# EAGLE board TCAN4551-BoB-R2B (EAGLE 7.5.0)
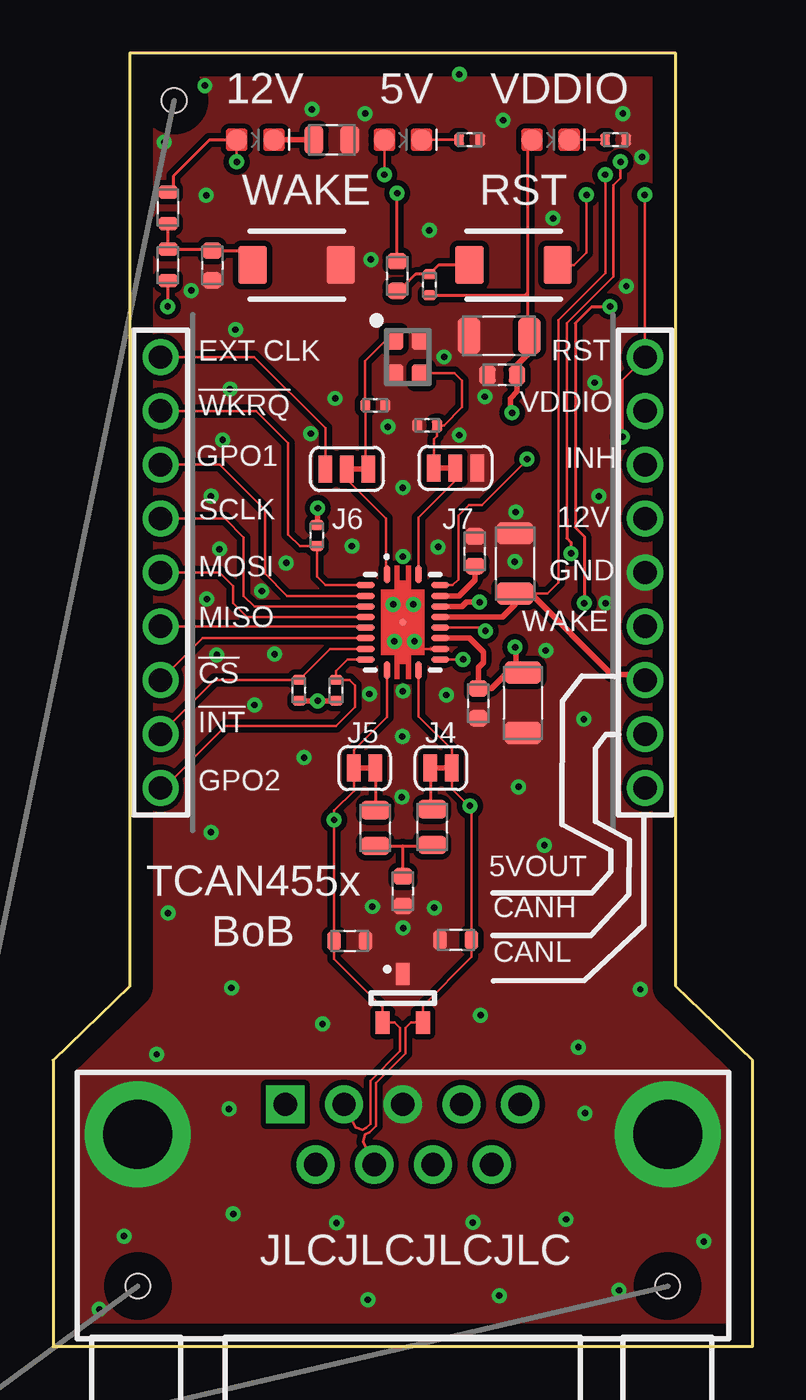
[diagram p0: board, top side]
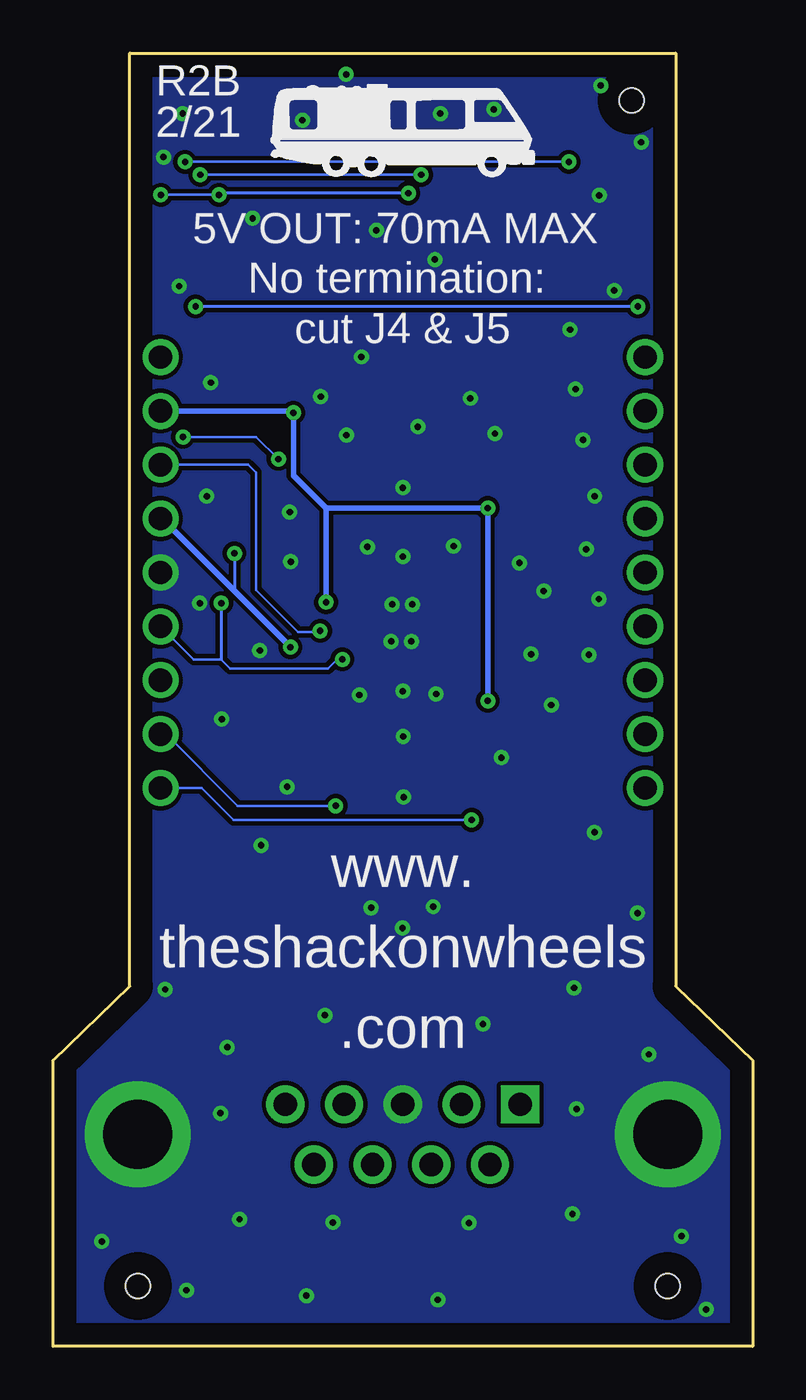
[diagram p1: board, bottom side, seen from below]

Size 33 x 61 mm. Coordinates in mm from the lower left corner, seen from the top.
Outline: 29.38,61 3.62,61 3.62,16.99 0,13.5 0,0 33,0 33,13.5 29.38,16.99 29.38,61
Copper layers (1*16): Top 0.035mm / dielectric 1.5mm / Bottom 0.035mm
Design rules "default *": minimum track width 10mil, minimum drill 0.61mm, track to track 8mil, track to pad 8mil, pad to pad 8mil, via to via 8mil, smd to smd 8mil, copper to edge 40mil, drill to drill 8mil, minimum pad ring 0mil, minimum via ring 8mil, stop-mask expansion 2mil, vias tented up to drill 12mil, thermal gap 10mil
Net classes: 0 Default: width 0.127 mm, clearance 0.127 mm, clearance 0.127 mm to class 1, clearance 0.127 mm to class 2; 1 DiffPair: width 0.127 mm, clearance 0.127 mm, clearance 0.127 mm to class 0, clearance 0.127 mm to class 2; 2 Power: width 0.25 mm, clearance 0.127 mm, clearance 0.127 mm to class 0, clearance 0.127 mm to class 1
Holes 1.15 mm at 5.71,58.76 29,2.84 4,2.84

## Footprints (pad centres in the part's own frame; a part is rotated, then mirrored left to right if it is on the bottom)
CAP_0603_L = smd 0.77 x 0.87: 1 -0.7,0; 2 0.7,0
CAP_0603_L_C2 = smd 0.77 x 0.87: 1 -0.7,0; 2 0.7,0
CAP_1206_L = smd 1.06 x 1.72: 1 -1.425,0; 2 1.425,0
CAP_1206_L_C5 = smd 1.06 x 1.72: 1 -1.425,0; 2 1.425,0
CAP_0603_L_C6 = smd 0.77 x 0.87: 1 -0.7,0; 2 0.7,0
CAP_0603_L_C7 = smd 0.77 x 0.87: 1 -0.7,0; 2 0.7,0
RES_0603_L = smd 0.65 x 0.87: 1 -0.745,0; 2 0.745,0
RES_0603_L_C10 = smd 0.65 x 0.87: 1 -0.745,0; 2 0.745,0
CAP_0402_L = smd 0.49 x 0.59: 1 -0.47,0; 2 0.47,0
CAP_0402_L_C13 = smd 0.49 x 0.59: 1 -0.47,0; 2 0.47,0
LED-0603 = smd 1 x 1: A -0.877,0; C 0.877,0
LED-0603_D2 = smd 1 x 1: A -0.877,0; C 0.877,0
SOT23V2 = smd 1.05 x 0.65: 1 1.15,0; 2 -1.15,-0.95; 3 -1.15,0.95
DS1037-09MNAKT74-0CC = drill 1.1 pad 1.8 square: 1 -5.54,1.42 | drill 1.1 pad 1.8: 2 -2.77,1.42; 3 0,1.42; 4 2.77,1.42; 5 5.54,1.42; 6 -4.115,-1.42; 7 -1.345,-1.42; 8 1.425,-1.42; 9 4.195,-1.42 | drill 3.25 pad 5: 10 -12.5,0; 11 12.5,0
HDR-1x9T/2.54/23x2 = drill 1.1 pad 1.7: 1 -10.16,0; 2 -7.62,0; 3 -5.08,0; 4 -2.54,0; 5 0,0; 6 2.54,0; 7 5.08,0; 8 7.62,0; 9 10.16,0
HDR-1x9T/2.54/23x2_J3 = drill 1.1 pad 1.7: 1 -10.16,0; 2 -7.62,0; 3 -5.08,0; 4 -2.54,0; 5 0,0; 6 2.54,0; 7 5.08,0; 8 7.62,0; 9 10.16,0
SMT-JUMPER_2_NC_TRACE_SILK = smd 0.635 x 1.27: 1 -0.508,0; 2 0.508,0
SMT-JUMPER_2_NC_TRACE_SILK_J5 = smd 0.635 x 1.27: 1 -0.508,0; 2 0.508,0
SMT-JUMPER_3_1-NC_TRACE_SILK = smd 0.635 x 1.27: 1 -1.016,0; 2 0,0; 3 1.016,0
SMT-JUMPER_3_1-NC_TRACE_SILK_J7 = smd 0.635 x 1.27: 1 -1.016,0; 2 0,0; 3 1.016,0
RES_0603_L_R1 = smd 0.65 x 0.87: 1 -0.745,0; 2 0.745,0
RES_0805_L = smd 0.88 x 1.32: 1 -0.845,0; 2 0.845,0
RES_0402_L = smd 0.47 x 0.6: 1 -0.495,0; 2 0.495,0
RES_0402_L_R6 = smd 0.47 x 0.6: 1 -0.495,0; 2 0.495,0
RES_0402_L_R7 = smd 0.47 x 0.6: 1 -0.495,0; 2 0.495,0
RES_0402_L_R8 = smd 0.47 x 0.6: 1 -0.495,0; 2 0.495,0
RES_0805_L_R10 = smd 0.88 x 1.32: 1 -0.845,0; 2 0.845,0
TS-1088-AR02016 = smd 1.35 x 1.8: 1 -2.075,0; 2 2.075,0
RQFN-20/3.5x4.5x0.5 = smd 0.3 x 0.85: 1 -0.75,2.26; 10 -0.75,-2.26; 11 0.75,-2.26; 20 0.75,2.26 | smd 0.85 x 0.3: 2 -1.76,1.75; 3 -1.76,1.25; 4 -1.76,0.75; 5 -1.76,0.25; 6 -1.76,-0.25; 7 -1.76,-0.75; 8 -1.76,-1.25; 9 -1.76,-1.75; 12 1.76,-1.75; 13 1.76,-1.25; 14 1.76,-0.75; 15 1.76,-0.25; 16 1.76,0.25; 17 1.76,0.75; 18 1.76,1.25; 19 1.76,1.75 | smd 0.32 x 0.32: 21 0,0
TXM40M0004252HBCEO00T = smd 1 x 0.9: 1 -0.85,-0.65; 2 0.85,-0.65; 3 0.85,0.65; 4 -0.85,0.65

## Placement (x,y rotation side)
C1  10nF 50V  [CAP_0603_L]  7.52,50.98 270 top
C2  100nF 50V  [CAP_0603_L_C2]  21.19,45.81 180 top
C3  10uF 50V  [CAP_1206_L]  21.04,47.66 180 top
C4  10uF 50V  [CAP_1206_L]  22.17,30.35 270 top
C5  10uF 50V  [CAP_1206_L_C5]  21.8,36.93 90 top
C6  330nF 25V  [CAP_0603_L_C6]  19.9,37.5 90 top
C7  100nF 50V  [CAP_0603_L_C7]  20.06,30.33 270 top
C8  10nF 50V  [CAP_0603_L_C7]  16.23,50.48 270 top
C9  47pF 50V  [RES_0603_L]  19,19.17 180 top
C10  47pF 50V  [RES_0603_L_C10]  14,19.12 0 top
C11  4700pF 50V  [CAP_0603_L]  16.5,21.47 270 top
C12  15pF 50V  [CAP_0402_L]  17.65,43.43 180 top
C13  15pF 50V  [CAP_0402_L_C13]  15.2,44.38 0 top
D1  RED  [LED-0603]  9.54,56.91 0 top
D2  GREEN  [LED-0603_D2]  16.51,56.91 0 top
D3  BLUE  [LED-0603_D2]  23.47,56.91 0 top
D4  SZNUP2105LT1G  [SOT23V2]  16.5,16.42 90 top
J1  DB9 CONNECTOR  [DS1037-09MNAKT74-0CC]  16.5,10 0 top
J2  644456-9  [HDR-1x9T/2.54/23x2]  5.07,36.5 270 top
J3  644456-9  [HDR-1x9T/2.54/23x2_J3]  27.93,36.5 90 top
J4  JUMPER-SMT_2_NC_TRACE_SILK  [SMT-JUMPER_2_NC_TRACE_SILK]  18.3,27.27 0 top
J5  JUMPER-SMT_2_NC_TRACE_SILK  [SMT-JUMPER_2_NC_TRACE_SILK_J5]  14.7,27.27 180 top
J6  JUMPER-SMT_3_1-NC_TRACE_SILK  [SMT-JUMPER_3_1-NC_TRACE_SILK]  13.87,41.38 0 top
J7  JUMPER-SMT_3_1-NC_TRACE_SILK  [SMT-JUMPER_3_1-NC_TRACE_SILK_J7]  18.98,41.43 180 top
R1  3k 1%  [RES_0603_L_R1]  5.43,53.7 270 top
R2  33k 1%  [RES_0603_L_R1]  5.43,51 270 top
R3  10k 1%  [RES_0805_L]  13.16,56.91 180 top
R4  330R 1%  [RES_0402_L]  19.65,56.91 180 top
R5  330R 1%  [RES_0402_L]  26.54,56.91 180 top
R6  10k 1%  [RES_0402_L_R6]  12.45,38.25 270 top
R7  10k 1%  [RES_0402_L_R7]  13.35,30.95 90 top
R8  10k 1%  [RES_0402_L_R8]  11.6,30.95 90 top
R9  10k 1%  [RES_0402_L_R7]  17.76,50.07 90 top
R10  60R4 1/8W  [RES_0805_L_R10]  17.89,24.49 90 top
R11  60R4 1/8W  [RES_0805_L]  15.2,24.45 90 top
S1  TS-1088-AR02016  [TS-1088-AR02016]  11.5,51 0 top
S2  TS-1088-AR02016  [TS-1088-AR02016]  21.73,51 0 top
U1  TCAN4551-Q1  [RQFN-20/3.5x4.5x0.5]  16.5,34.15 0 top
Y1  40MHz  [TXM40M0004252HBCEO00T]  16.73,46.66 270 top

## Library data of the parts
C1 C8 = common; LCSC_BASIC_PART: Yes; LCSC_PART_#: C57112; OPERATING_TEMP: -55C - 125C; PACKAGE_CODE: 0603; TEMP_COEFFICIENT: X7R; TOLERANCE: ±10%; VOLTAGE_RATING: 50V
C2 C7 = common; LCSC_PART_#: C14663; OPERATING_TEMP: -55C - 125C; PACKAGE_CODE: 0603; TEMP_COEFFICIENT: X7R; TOLERANCE: ±10%; VOLTAGE_RATING: 50V
C3-C5 = common; LCSC_PART_#: C13585; OPERATING_TEMP: -40C - 85C; PACKAGE_CODE: 1206; TEMP_COEFFICIENT: X5R; TOLERANCE: ±10%; VOLTAGE_RATING: 50V
C6 = common; LCSC_PART_#: C1615; OPERATING_TEMP: -55C - 125C; PACKAGE_CODE: 0603; TEMP_COEFFICIENT: X7R; TOLERANCE: ±10%; VOLTAGE_RATING: 50V
C9 C10 = common; LCSC_BASIC_PART: Yes; LCSC_PART_#: C1671; OPERATING_TEMP: -55C - 125C; PACKAGE_CODE: 0603; TEMP_COEFFICIENT: C0G; TOLERANCE: ±5%; VOLTAGE_RATING: 50V
C11 = common; LCSC_BASIC_PART: Yes; LCSC_PART_#: C53987; OPERATING_TEMP: -55C - 125C; PACKAGE_CODE: 0603; TEMP_COEFFICIENT: X7R; TOLERANCE: ±10%; VOLTAGE_RATING: 50V
C12 C13 = common; LCSC_PART_#: C1547; OPERATING_TEMP: -55C - 125C; PACKAGE_CODE: 0402; TEMP_COEFFICIENT: C0G; TOLERANCE: ±5%; VOLTAGE_RATING: 50V
D1 = common; LCSC_BASIC_PART: Yes; LCSC_PART_#: C2286
D2 = common; LCSC_BASIC_PART: Yes; LCSC_PART_#: C72043
D3 = common; LCSC_BASIC_PART: Yes; LCSC_PART_#: C72041
D4 = common; LCSC_BASIC_PART: No; LCSC_PART_#: C233494; MANUFACTURER: ON
J1 = common; DATASHEET: https://datasheet.lcsc.com/szlcsc/1811081022_CONNFLY-Elec-DS1037-09MNAKT74-0CC_C75750.pdf; LCSC_BASIC_PART: No; LCSC_PART_#: C75750; MANUFACTURER: CONNFLY Elec; MANUFACTURER_PART_#: DS1037-09MNAKT74-0CC
J2 J3 = common; DATASHEET: http://datasheets.diptrace.com/con_headers/ENG_CD_644456_D2.pdf; MANUFACTURER: TE Connectivity
J4-J7 = common
R1 = common; LCSC_BASIC_PART: Yes; LCSC_PART_#: C4211; OPERATING_TEMP: -55C - 155C; PACKAGE_CODE: 0603; POWER_RATING: 1/10W; TOLERANCE: 1%
R2 = common; LCSC_BASIC_PART: Yes; LCSC_PART_#: C4216; OPERATING_TEMP: -55C - 155C; PACKAGE_CODE: 0603; POWER_RATING: 1/10W; TOLERANCE: 1%
R3 = common; LCSC_BASIC_PART: Yes; LCSC_PART_#: C17414; OPERATING_TEMP: -55C - 155C; PACKAGE_CODE: 0805; POWER_RATING: 1/10W; TOLERANCE: 1%
R4 R5 = common; LCSC_BASIC_PART: Yes; LCSC_PART_#: C25104; OPERATING_TEMP: -55C - 155C; PACKAGE_CODE: 0402; POWER_RATING: 1/16W; TOLERANCE: 1%
R6 = common; DNP: DNP; LCSC_BASIC_PART: Yes; LCSC_PART_#: C25744; OPERATING_TEMP: -55C - 155C; PACKAGE_CODE: 0402; POWER_RATING: 1/16W; TOLERANCE: 1%
R7-R9 = common; LCSC_BASIC_PART: Yes; LCSC_PART_#: C25744; OPERATING_TEMP: -55C - 155C; PACKAGE_CODE: 0402; POWER_RATING: 1/16W; TOLERANCE: 1%
R10 R11 = common; LCSC_BASIC_PART: No; LCSC_PART_#: C72998; OPERATING_TEMP: -55C - 155C; PACKAGE_CODE: 0805; POWER_RATING: 1/8W; TOLERANCE: 1%
S1 S2 = common; DATASHEET: https://datasheet.lcsc.com/szlcsc/2008221234_XUNPU-TS-1088-AR02016_C720477.pdf; DIMENSIONS: 3x4x2mm; LCSC_BASIC_PART: No; LCSC_PART_#: C720477; MANUFACTURER: XUNPU
U1 = common; MANUFACTURER: Texas Instruments
Y1 = common; DATASHEET: https://datasheet.lcsc.com/szlcsc/1810171034_TAE-Zhejiang-Abel-Elec-TXM40M0004252HBCEO00T_C284176.pdf; LCSC_BASIC_PART: No; LCSC_PART_#: C284176; LOAD_CAPACITANCE: 15pF; MANUFACTURER: Zhejiang Abel Elec

## Nets
5V_OUT [Power]: C5.1 D2.A J3.3 U1.16
12V_IN [Power]: C4.1 C7.1 D1.A J3.6 R1.1 U1.14
BLUE_C: D3.C R5.2
CAN_!INT: J2.8 R8.2 U1.8
CAN_!WKRQ: J2.2 R6.2 U1.2
CAN_CLOCK_IN: J2.1 J6.1
CAN_GPO1: J2.3 U1.3
CAN_GPO2: J2.9 R7.2 U1.9
CAN_H_OPT_TERM: J4.1 R10.2
CAN_IF_!CS: J2.7 U1.7
CAN_IF_MISO: J2.6 U1.6
CAN_IF_MOSI: J2.5 U1.5
CAN_IF_SCLK: J2.4 U1.4
CAN_INH: J3.7 U1.15
CAN_L_OPT_TERM: J5.1 R11.2
CAN_LDO_FLTR [Power]: C6.1 U1.18
CAN_N [DiffPair]: C10.1 D4.3 J1.2 J3.1 J5.2 U1.10
CAN_OSC1: J6.2 U1.1
CAN_OSC2: J7.2 U1.20
CAN_OSC_IN: C13.1 J6.3 Y1.1
CAN_OSC_OUT: C12.1 J7.3 Y1.3
CAN_P [DiffPair]: C9.1 D4.2 J1.7 J3.2 J4.2 U1.11
CAN_RST: C8.1 J3.9 S2.2 U1.19
CAN_SPLIT_TERM: C11.1 R10.1 R11.1
CAN_WAKE: J3.4 R2.2 U1.12
CAN_WAKE_HV: C1.1 R1.2 R2.1 S1.1
GND: C1.2 C2.2 C3.2 C4.2 C5.2 C6.2 C7.2 C9.2 C10.2 C11.2 C12.2 C13.2 D4.1 J1.3 J1.10 J1.11 J3.5 J7.1 R3.1 R4.1 R5.1 S1.2 U1.13 U1.21 Y1.2 Y1.4
GREEN_C: D2.C R4.2
RED_C [Power]: D1.C R3.2
RST_PU: C8.2 R9.2 S2.1
VDD_IO [Power]: C2.1 C3.1 D3.A J3.8 R6.1 R7.1 R8.1 R9.1 U1.17

## Tracks (layer width: path | path; a pad name or v marks a point on that pad's centre or on a via)
5V_OUT  (via drill 0.3 pad 0.6)
  Top 0.127: D2.A v15.63,55.26 | v26.05,55.26 26.05,50.61 23.85,48.4 23.85,36.03 23.32,35.5 22.55,35.5
  Top 0.25: J3.3 27.93,31.7 26.35,31.7 22.55,35.5 C5.1 21.8,35 21.2,34.4 U1.16
  Bottom 0.127: v15.63,55.26 v26.05,55.26
12V_IN  (via drill 0.3 pad 0.6)
  Top 0.127: D1.A v8.67,55.86 | v26.77,55.86 26.77,55.11 26.43,54.77 26.43,50.46 24.24,48.27 24.24,39.04
  Top 0.15: R1.1 5.68,54.44 5.68,55.21 7.38,56.91 D1.A | 24.24,39.04 24.24,38.12 24.44,37.92 v24.44,37.41
  Top 0.25: U1.14 19.65,33.4 20.3,32.75 20.3,32.25 20.06,32.01 C7.1 20.68,31.03 21.43,31.78 C4.1 21.84,31.78 21.84,32.98 v21.8,32.98
  Bottom 0.127: J3.6 27.93,39.16 | v8.67,55.86 v26.77,55.86
  Bottom 0.15: v24.44,37.41 24.44,35.62
  Bottom 0.25: v21.8,32.98 24.44,35.62 27.86,39.04 J3.6
BLUE_C
  Top 0.127: D3.C R5.2 | R5.2
CAN_!INT
  Top 0.127: J2.8 7.63,31.44 R8.2 13.06,32.9 U1.8
CAN_!WKRQ
  Top 0.127: U1.2 12.85,35.9 12.45,36.31 R6.2 11.64,37.76 11.1,38.3 11.1,42.6 9.58,44.12 J2.2
CAN_CLOCK_IN
  Top 0.127: J2.1 9.49,46.66 12.85,43.3 J6.1
CAN_GPO1
  Top 0.127: J2.3 7.87,41.58 10,39.45 10,36.45 11.05,35.4 U1.3 | U1.3
CAN_GPO2
  Top 0.127: U1.9 13.9,32.4 13.35,31.85 R7.2 13.98,31.44 14.25,31.17 14.25,30.15 13.35,29.25 8.15,29.25 5.24,26.34 J2.9
CAN_H_OPT_TERM
  Top 0.15: J4.1 17.8,25.43 R10.2
CAN_IF_!CS
  Top 0.127: J2.7 7.05,33.4 U1.7 | U1.7
CAN_IF_MISO
  Top 0.127: J2.6 14.68,33.96 U1.6
CAN_IF_MOSI
  Top 0.127: U1.5 9.15,34.4 8.5,35.05 8.5,35.85 7.85,36.5 J2.5
CAN_IF_SCLK
  Top 0.127: J2.4 8.11,39.04 9,38.15 9,35.4 9.5,34.9 U1.4
CAN_INH  (via drill 0.3 pad 0.6)
  Top 0.127: U1.15 20.25,33.9 v20.4,33.75
  Bottom 0.127: v20.4,33.75 20.4,33.7 21.45,33.7 23.41,35.67 23.41,41.21 23.79,41.58 J3.7
CAN_L_OPT_TERM
  Top 0.15: J5.1 R11.2
CAN_LDO_FLTR
  Top 0.25: C6.1 19.9,36.15 19.15,35.4 U1.18
CAN_N  (via drill 0.3 pad 0.6)
  Top 0.127: U1.10 15.75,29.7 14.19,28.14 J5.2 14.19,26.2 13.25,25.27 C10.1 | J1.2 14.27,10.34 14.61,10.23 14.78,10.31 14.98,10.51 14.98,12.54 16.37,13.93 16.37,14.82 16.37,15.02 16.12,15.27 D4.3 15.55,15.98 13.25,18.28 C10.1 | C10.1 v13.25,24.83
  Bottom 0.127: v13.25,24.83 24.49,24.83 26,26.34 J3.1
CAN_OSC1
  Top 0.127: J6.2 13.87,40.88 15.7,39.05 15.7,36.5 15.75,36.45 U1.1
CAN_OSC2
  Top 0.127: U1.20 17.25,39.1 18.98,40.84 J7.2
CAN_OSC_IN
  Top 0.127: J6.3 14.75,41.38 14.75,44.37 C13.1 14.73,46.48 15.76,47.51 Y1.1
CAN_OSC_OUT
  Top 0.127: J7.3 17.97,42.78 18.12,42.94 C12.1 18.43,43.44 19.3,44.3 19.3,45.55 18.95,45.9 17.47,45.9 Y1.3
CAN_P  (via drill 0.3 pad 0.6)
  Top 0.127: U1.11 17.25,29.72 18.81,28.16 J4.2 18.81,26.3 19.75,25.37 | J1.7 14.61,9.66 14.73,10 14.93,10.1 15.23,10.41 15.23,12.43 16.63,13.83 16.63,14.82 16.63,15.02 16.88,15.27 D4.2 17.45,16.07 19.75,18.36 C9.1 19.75,25.37 | 19.75,25.37 19.8,25.37 v19.67,25.5
  Bottom 0.127: v19.67,25.5 24.28,25.5 27.67,28.88 J3.2
CAN_RST  (via drill 0.3 pad 0.6)
  Top 0.127: S2.2 24.57,51 25.17,51.6 v25.17,54.31 | v27.91,54.31 27.91,46.68 J3.9 27.93,46.64 26.87,45.58 v26.87,42.9 | v22.37,41.85 22.38,41.83 20.24,39.69 19.62,39.69 19.12,39.18 19.12,36.17 18.85,35.9 U1.19
  Top 0.15: C8.1 v16.23,54.39
  Bottom 0.127: v25.17,54.31 v27.91,54.31 | v26.87,42.9 23.41,42.9 v22.37,41.85
  Bottom 0.15: v16.23,54.39 25.17,54.39 v25.17,54.31
CAN_SPLIT_TERM
  Top 0.15: R11.1 16.5,23.61 | 16.5,23.61 17.84,23.61 R10.1 | C11.1 16.5,23.61
CAN_WAKE  (via drill 0.3 pad 0.6)
  Top 0.127: U1.12 v19.35,32.4
  Top 0.15: R2.2 5.41,50.25 v5.41,49.05 | v26.27,49.05 26.27,49.01 25.4,49.01 24.64,48.25 24.64,38.62 25.06,38.2 v25.06,35.05
  Bottom 0.127: v19.35,32.4 19.6,32.4 20.02,31.98 24.64,31.98 25.06,32.4 26.37,32.4 J3.4
  Bottom 0.15: v5.41,49.05 v26.27,49.05 | v25.06,35.05 25.06,32.4
CAN_WAKE_HV
  Top 0.15: R1.2 R2.1 7.45,51.75 C1.1 8.75,51.68 S1.1
GND  (via drill 0.3 pad 0.6)
  Top 0.127: U1.13 17.25,32.9 16.5,33.65 U1.21
  other vias: 16.51,19.74 15.06,20.74 17.99,20.69 18.45,46.67 13.31,44.71 16.5,37.25 16.5,30.9 8.35,45.15 12.15,43.05 8,42.75 11,36.95 7.45,40.1 9.85,35.62 7.85,37.6 7.25,35.25 7.72,32.62 10.45,32.65 9.5,30.25 14.73,58.14 8.3,11.2 8.5,6.25 3.35,5.2 2.19,1.75 21.24,57.83 13.38,5.82 14.85,2.2 19.8,5.85 21.05,2.4 25.1,11 24.2,6 26.7,2.65 30.7,4.95 20.17,15.62 27.71,16.84 27.79,56.09 18.17,37.71 18.55,30.73 6.52,49.8 21.78,37.01 19.16,42.98 20.37,44.79 14.92,30.77 16.48,28.77 16.46,25.91 21.83,39.35 16.05,35 17,35 16.1,33.25 17.05,33.25 14.1,37.75 12.72,15.21 24.78,14.11 16.5,40.5 15.79,43.37 25.75,40.1 8.42,16.91 4.89,13.77 5.42,20.44 7.45,24.25 11.84,27.77 8.61,47.95 14.99,51.26 26.07,35.05 23.25,32.82 25.56,45.45 27.05,50 23.59,53.2 17.75,52.64 26.88,58.15 19.17,59.99 12.21,58.34 7.16,59.47 5.25,56.79 7.23,54.29 21.96,26.4 23.18,23.64 25.04,29.58
  pour Bottom (isolate 0.153): 28.94,60.57 4.06,60.57 4.06,16.81 0.43,13.32 0.43,0.43 32.57,0.43 32.57,13.32 28.94,16.81
  pour Top (isolate 0.254): 28.94,60.57 4.06,60.57 4.06,16.81 0.43,13.32 0.43,0.43 32.57,0.43 32.57,13.32 28.94,16.81
GREEN_C
  Top 0.127: D2.C R4.2 | R4.2
RED_C
  Top 0.25: D1.C R3.2 | R3.2
RST_PU
  Top 0.15: S2.1 18.19,51 R9.2 17.11,50.56 16.33,49.78 C8.2
VDD_IO  (via drill 0.3 pad 0.6)
  Top 0.15: D3.A 22.39,56.91 22.39,49.7 | 22.39,49.7 22.39,47.74 C3.1 | R9.1 22.26,49.58 22.39,49.7
  Top 0.25: R8.1 v12.49,30.45 | v12.49,30.45 | v12.49,30.45 R7.1 | v12.49,39.54 12.49,38.79 R6.1 | C3.1 22.46,46.87 21.89,46.29 C2.1 21.89,45.02 21.57,44.7 21.57,44.03 v21.66,44.03 | v20.12,35.1 19.5,35.1 19.3,34.9 U1.17
  Bottom 0.25: v12.49,30.45 v12.49,39.54 20.12,39.54 | 20.12,39.54 21.66,41.08 v21.66,44.03 21.75,43.94 21.93,44.12 J3.8 | 20.12,39.54 v20.12,35.1

## Text on the board
tPlace: 12V | 5V | VDDIO | WAKE | RST | EXT CLK | RST | VDDIO | !WKRQ | GPO1 | INH | SCLK | 12V | J6 | J7 | MOSI | GND | MISO | WAKE | !CS | !INT | J5 | J4 | GPO2 | 5VOUT | TCAN455x / BoB | CANH | CANL | JLCJLCJLCJLC
bPlace: R2B | 2/21 | 5V OUT: 70mA MAX | No termination: / cut J4 & J5 | www. / theshackonwheels / .com
tDocu: D2 | D3 | R3 | D1 | R4 | R5 | R1 | R2 | C1 | S1 | S2 | C8 | R9 | C3 | Y1 | C2 | C13 | C12 | J6 | J7 | R6 | C6 | C5 | J2 | J3 | U1 | R8 | R7 | C7 | C4 | J5 | J4 | R11 | R10 | C11 | C10 | C9 | D4 | J1 | TOOLING HOLES